# Altium PCB PCB1.PcbDoc
Units mm, origin at the board's own origin, x right, y up, seen from the top; angles counter-clockwise.
Board outline 58.42 x 54.86 mm, 2 copper layers (Top Layer, Bottom Layer); 43 components, 19 nets, 115 pads, 0 vias.
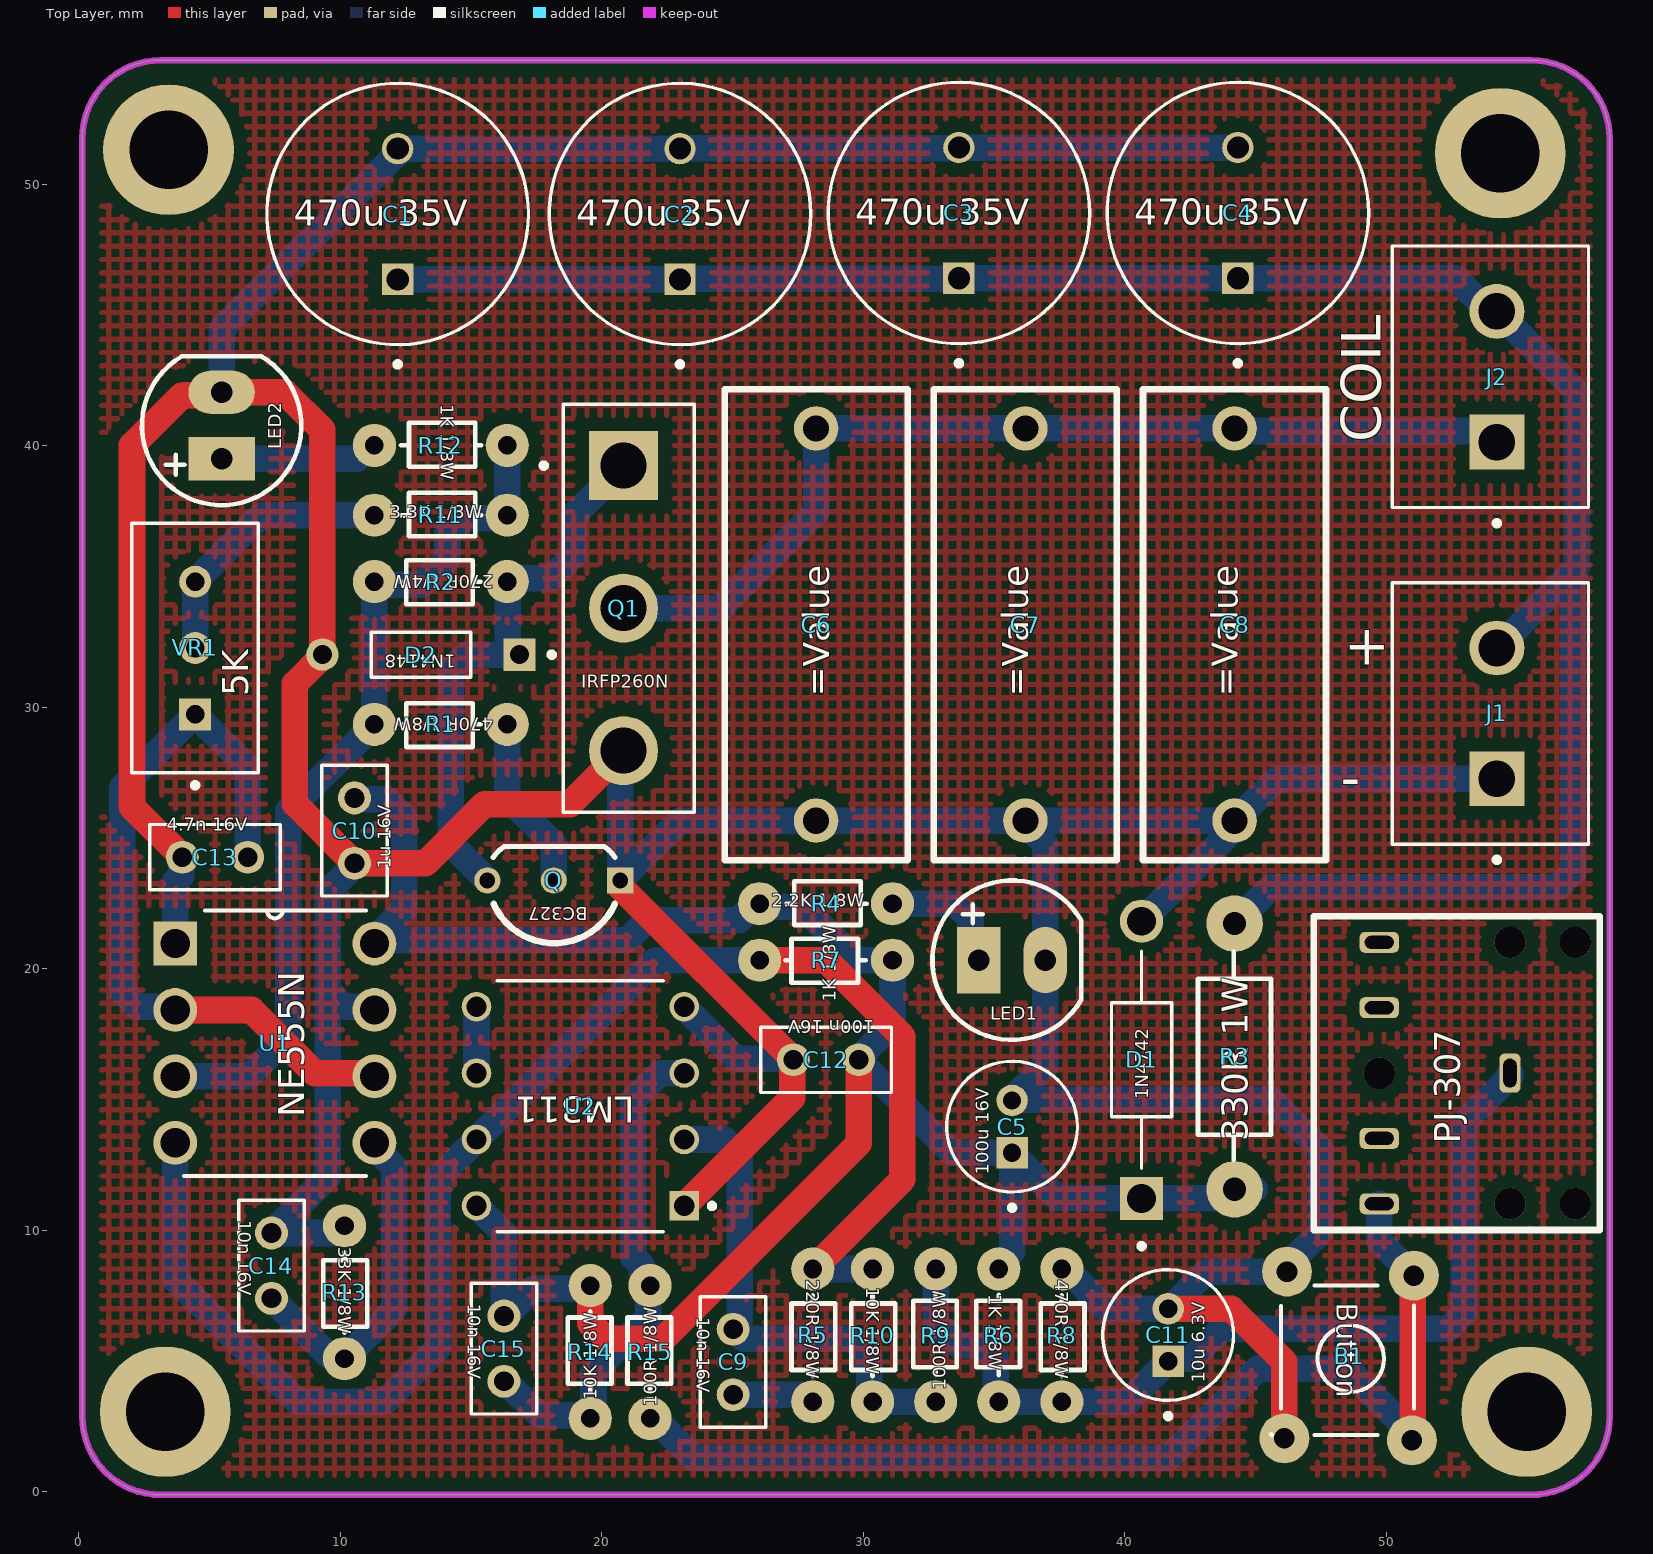
[diagram p0: Top Layer view]
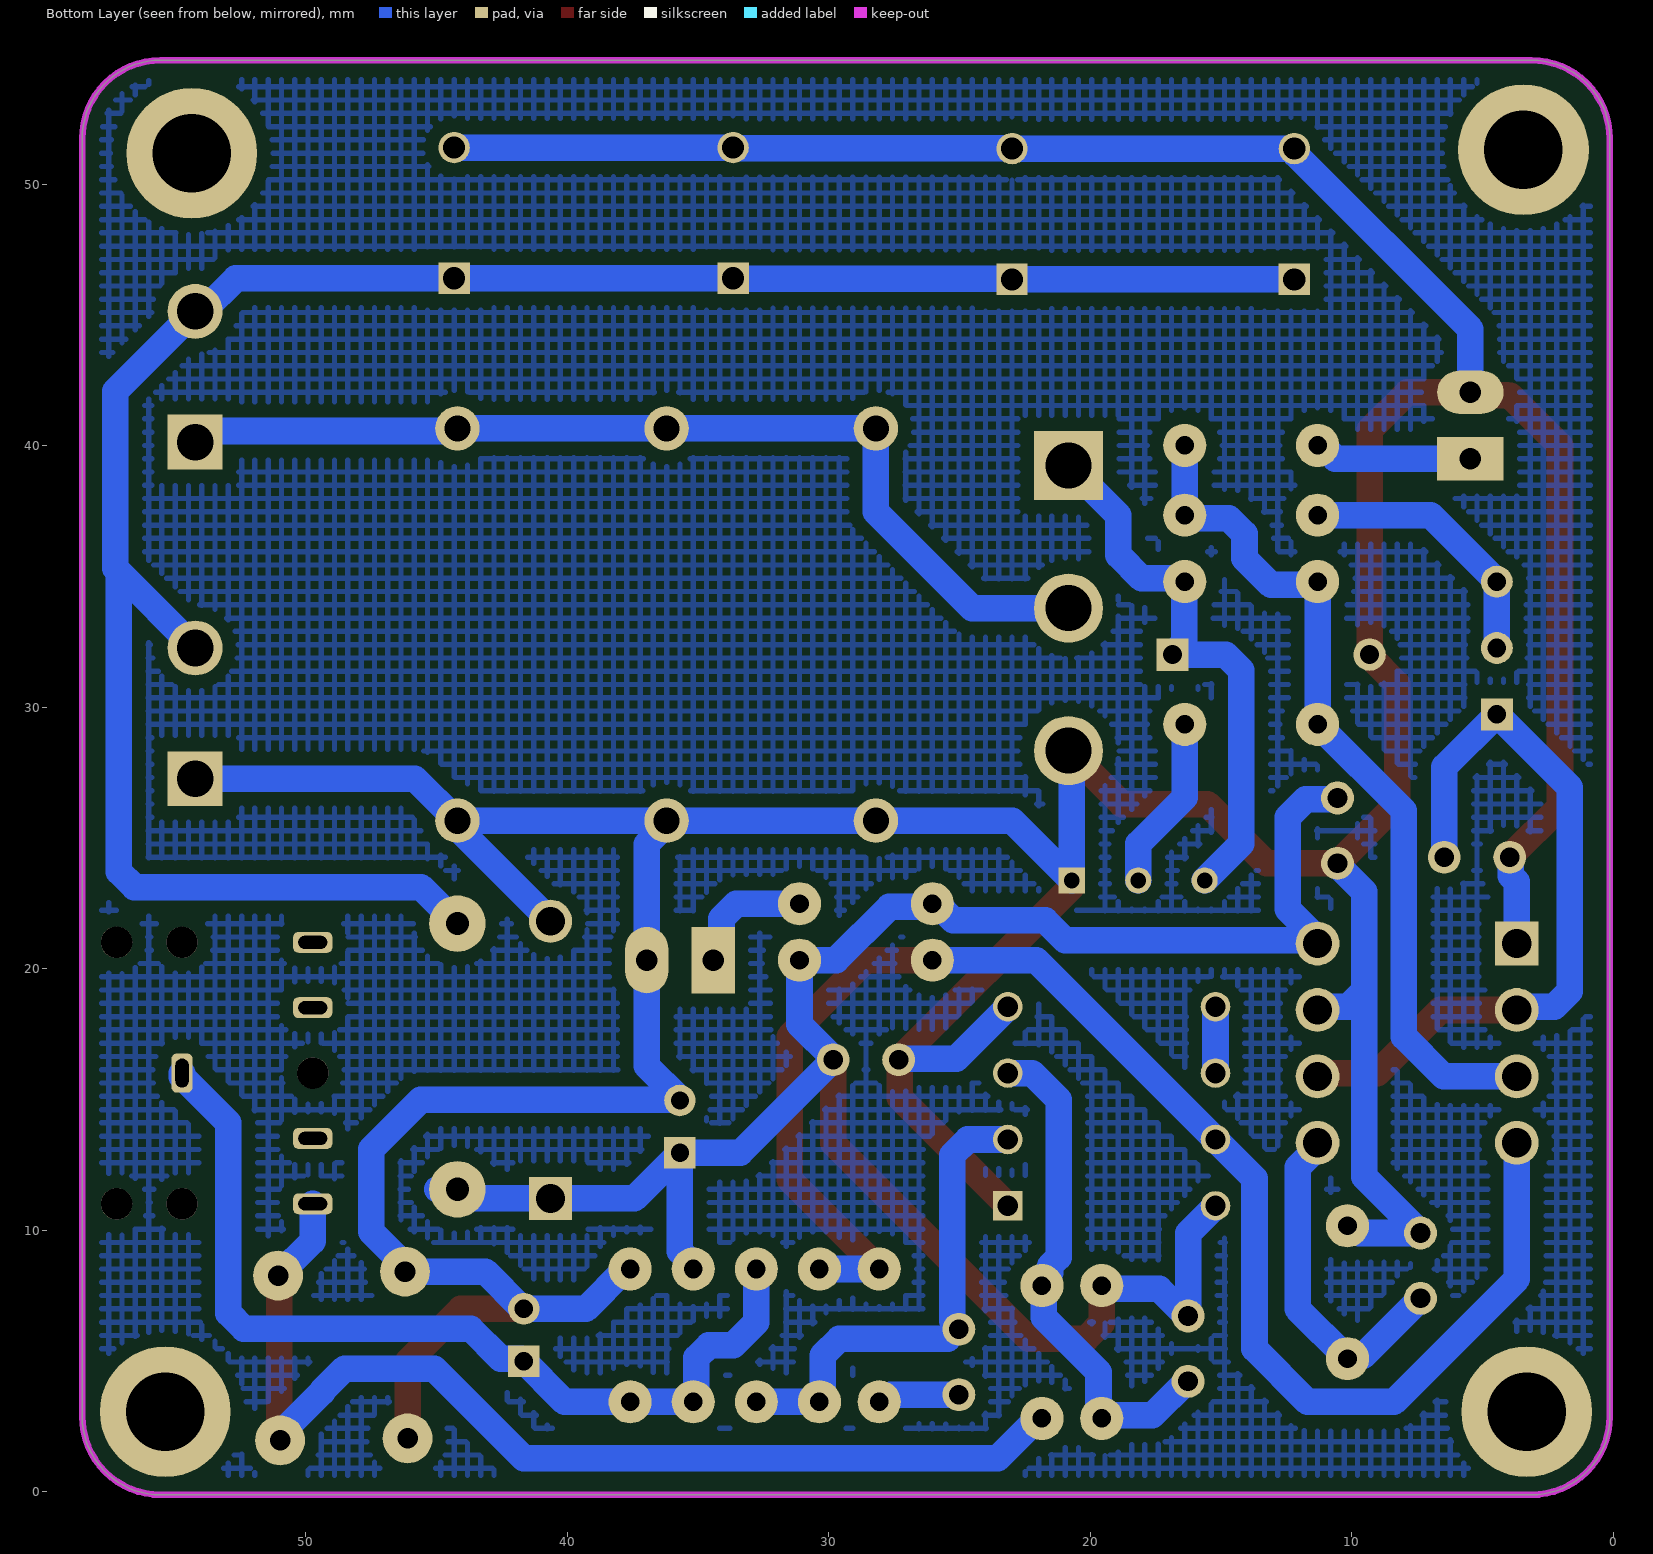
[diagram p1: Bottom Layer view, seen from below]
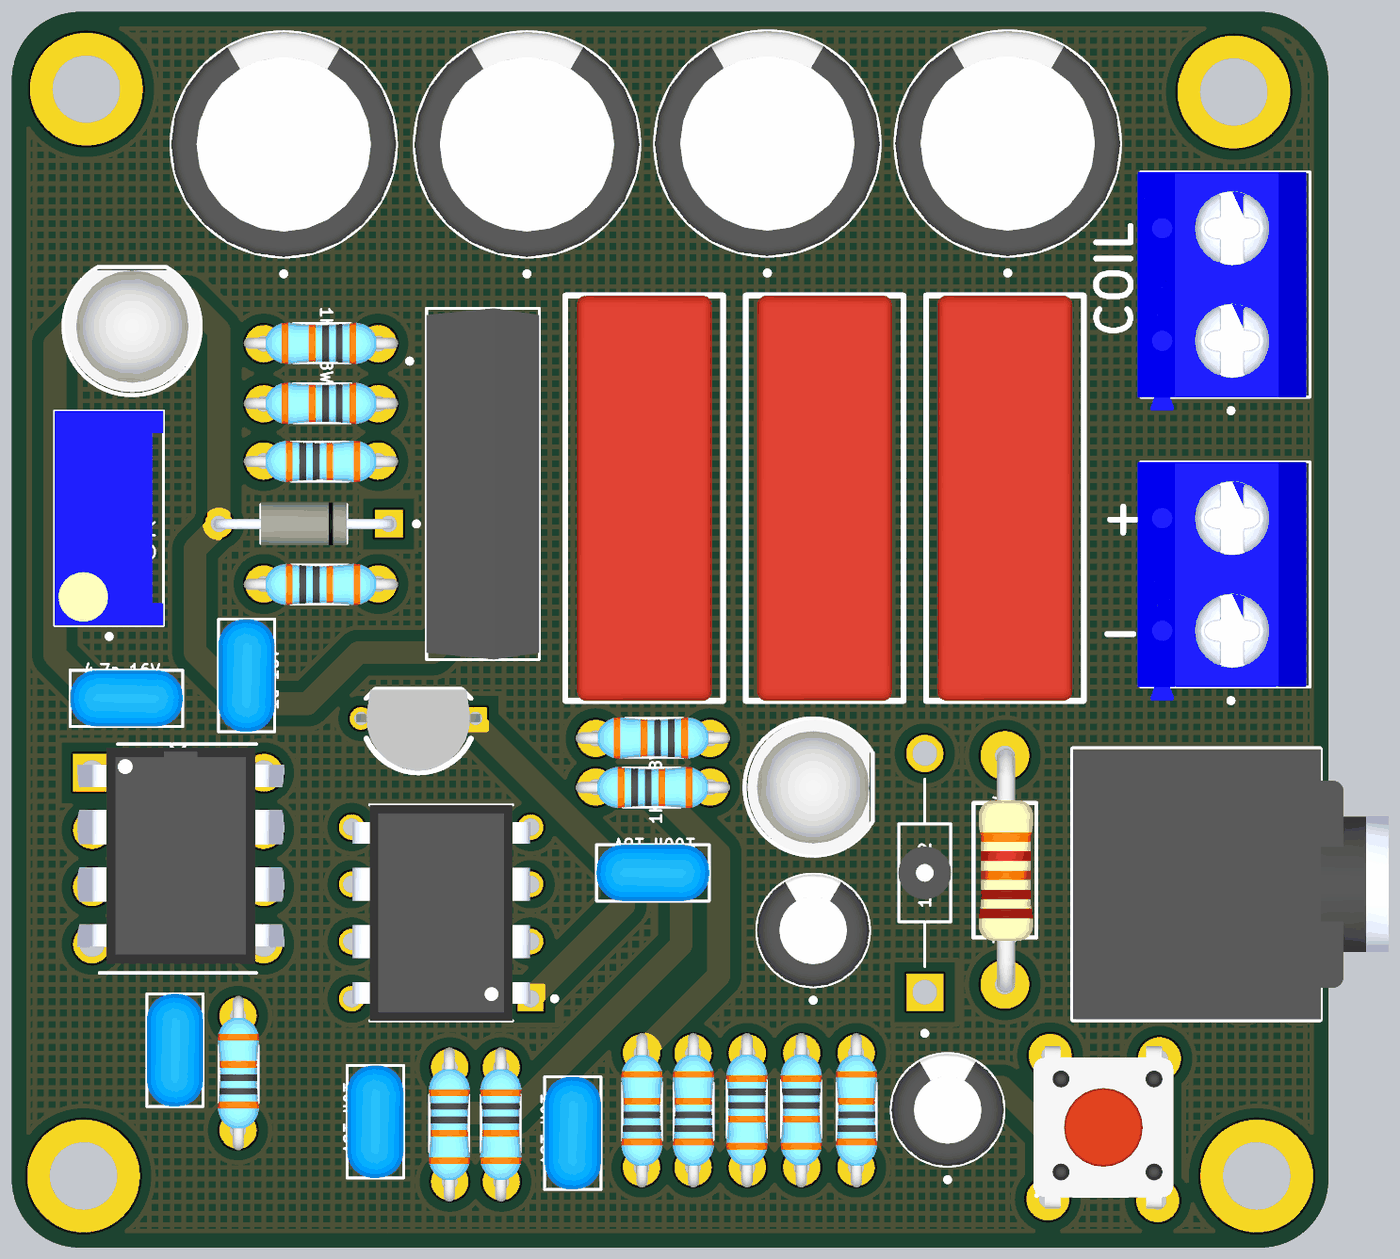
[diagram p2: 3D render of the assembled board from above, using the file's embedded part models]

## Layer stack, top to bottom
Top Solder: solder mask 0.0102, Solder Resist, Dk 3.5
Top Layer: signal copper 0.0356
Dielectric 1: dielectric 0.32, FR-4, Dk 4.8
Bottom Layer: signal copper 0.0356
Bottom Solder: solder mask 0.0102, Solder Resist, Dk 3.5

## Board outline
0.127,2.873 ccw(c3.127,2.873) 3.127,-0.127 55.547,-0.127 ccw(c55.547,2.873) 58.547,2.873 58.547,51.737 ccw(c55.547,51.737) 55.547,54.737 3.127,54.737 ccw(c3.127,51.737) 0.127,51.737

## Design rules (kind name [scope] priority, off if disabled: settings)
Clearance [All] p1: gap=0.254 ignorepadtopadclearanceinfootprint=FALSE except(0: Arc-Hole Track-Hole SMDPad-Hole THPad-Hole Via-Hole Fill-Hole Poly-Hole Region-Hole Text-Hole; 0.508: Arc-Fill Arc-Poly Arc-Region Track-Fill Track-Poly Track-Region SMDPad-Fill SMDPad-Poly SMDPad-Region THPad-Fill THPad-Poly THPad-Region Via-Fill Via-Poly Via-Region Fill-Fill Fill-Poly Fill-Region Poly-Poly Poly-Region Region-Region)
Height [All] p1: minheight=0 maxheight=100 prefheight=12.7
HoleSize [All] p1: absolutevalues=TRUE maxlimit=10 minlimit=0.025 maxpercent=80.000 minpercent=20.000
PolygonConnect [All] p1: connectstyle=Relief reliefconductorwidth=0.254 reliefentries=4 polygonreliefangle="90 Angle" airgapwidth=0.254
RoutingVias [All] p1: holewidth=0.711 width=1.27 viastyle="Through Hole" minholewidth=0.711 minwidth=1.27 maxholewidth=0.711 maxwidth=1.27
SilkToSilkClearance [All] p1: silktosilkclearance=0
SilkToSolderMaskClearance [IsPad] p1: minsilkscreentomaskgap=0 clearancetoexposedcopper=TRUE
SolderMaskExpansion [All] p1: expansion=0.102 istentingtop=FALSE
Width [All] p1: maxlimit=1.016 minlimit=0.508 preferedwidth=0.762
26 further rules are at their usual default settings.

## Components (designator, comment, footprint, x,y, rotation, side; value= is the part's Value field where it differs from the comment)
B1 "Button" "Button 4 DIP" 48.641,5.08 r270 top
C1 "470u 35V" CAP_10X16 12.192,48.855 r90 top value=100uF
C2 "470u 35V" CAP_10X16 22.987,48.855 r90 top value=100uF
C3 "470u 35V" CAP_10X16 33.655,48.895 r90 top value=100uF
C4 "470u 35V" CAP_10X16 44.323,48.895 r90 top value=100uF
C5 "100u 16V" "CAP 5x11" 35.687,13.954 r90 top value=100uF
C6 "=Value" MKP10 28.194,33.147 r90 top
C7 "=Value" MKP10 36.195,33.147 r90 top
C8 "=Value" MKP10 44.196,33.147 r90 top
C9 "10n 16V" CAP_2.54mm 25.019,4.953 r270 top
C10 "1u 16V" CAP_2.54mm 10.541,25.273 r270 top
C11 "10u 6.3V" "CAP 5x11" 41.656,5.985 r90 top value=100uF
C12 "100n 16V" CAP_2.54mm 28.575,16.51 r0 top
C13 "4.7n 16V" CAP_2.54mm 5.207,24.257 r0 top
C14 "10n 16V" CAP_2.54mm 7.366,8.636 r270 top
C15 "10n 16V" CAP_2.54mm 16.256,5.461 r270 top
D1 "1N4742" DIOAD1060W70L435D230 40.64,16.51 r90 top
D2 "1N4148" 1N4148 13.081,32.004 r180 top
J1 "Domino 2P" HANDSON_KF301-2P 54.229,29.758 r90 top
J2 "" HANDSON_KF301-2P 54.229,42.632 r90 top
LED1 "LED" LED-5-RED 34.417,20.32 r0 top value="LED 3 ly Single Colour"
LED2 "LED" LED-5-RED 5.461,39.497 r90 top value="LED 3 ly Single Colour"
PJ-307 "Jack 3.5" PJ-307 54.229,16.002 r90 top (schematic designator J?)
Q "BC327" TO-92 18.161,23.368 r180 top
Q1 "IRFP260N" IRFP260N 20.828,33.782 r270 top
R1 "470R 1/8W" R1/8W 13.843,29.337 r180 top
R2 "270R 1/4W" R1/8W 13.843,34.798 r180 top
R3 "330R 1W" R1/2W 44.196,21.717 r270 top
R4 "2.2K 1/8W" R1/8W 28.575,22.479 r0 top
R5 "220R 1/8W" R1/8W 28.067,5.969 r270 top
R6 "1K 1/8W" R1/8W 35.179,5.969 r90 top
R7 "1K 1/8W" R1/8W 28.575,20.32 r180 top
R8 "470R 1/8W" R1/8W 37.592,5.969 r270 top
R9 "100R 1/8W" R1/8W 32.766,5.969 r90 top
R10 "10K 1/8W" R1/8W 30.353,5.969 r270 top
R11 "3.3K 1/8W" R1/8W 13.843,37.338 r0 top
R12 "1K 1/8W" R1/8W 13.843,40.005 r0 top
R13 "33K 1/8W" R1/8W 10.16,7.62 r270 top
R14 "10K 1/8W" R1/8W 19.558,5.334 r90 top
R15 "100R 1/8W" R1/8W 21.844,5.334 r90 top
U1 "NE555N" NE555PE 11.303,13.335 r0 top
U2 "LM311" LM311PE 19.177,14.732 r180 top
VR1 "5K" TRIM_3296W-1-502 4.445,32.258 r90 top

## Footprints (in the part's own frame and the unit in brackets; to place one, negate y for a bottom-side part, rotate by r counter-clockwise, add the part's x,y. Pads: shape width x height; smd on the part's side, far side on the other; paste and mask are expansions set on the pad)
1N4148 [mm]
  round 1.238 hole 0.73: A(3.768,0)
  rect 1.238x1.238 / inner round 1.238 / far side rect 1.238x1.238 hole 0.73: K(-3.768,0)
  silkscreen extent -5.1,-0.86 1.9,0.86, body extent -4,-0.95 4,0.96, height 1.91
"Button 4 DIP" [mil]
  round 75 hole 31: 1(-125,95) 2(120,-100) 3(123,92) 4(-131,-96)
  silkscreen extent -110,-120 115,95, body extent -161,-125 151,119, height 276
"CAP 5x11" [mm]
  rect 1.208x1.208 / inner round 1.208 / far side rect 1.208x1.208 hole 0.7: 1(-1,0)
  round 1.208 hole 0.7: 2(1,0)
  silkscreen extent -3.2,-2.5 2.5,2.5, body extent -2.5,-2.5 2.5,2.5, height 12.5
CAP_2.54mm [mm] "GOM"
  round 1.258 hole 0.75: 1(-1.25,0) 2(1.25,0)
  silkscreen extent -2.5,-1.25 2.5,1.25, body extent -2.5,-1.25 2.5,1.25, height 6
CAP_10X16 [mm]
  rect 1.2x1.2 hole 0.85: 1(-2.5,0)
  round 1.2 hole 0.85: 2(2.5,0)
  silkscreen extent -5.85,-5 5,5, body extent -5,-5 5,5, height 16
DIOAD1060W70L435D230 [mm]
  round 1.65 hole 1.1: A(5.3,0)
  rect 1.65x1.65 hole 1.1: K(-5.3,0)
  silkscreen extent -7.22,-1.15 4.16,1.15, body extent -1.17,-1.17 1.17,1.17, height 27.72
HANDSON_KF301-2P [mm]
  rect 2.1x2.1 hole 1.4: 1(-2.5,0)
  round 2.1 hole 1.4: 2(2.5,0)
  silkscreen extent -5.7,-3.5 5,4, body extent -5.6,-3.35 5,4.15, height 10
IRFP260N [mm]
  rect 2.64x2.64 hole 1.76: 1(-5.45,0)
  round 2.64 hole 1.76: 2(0,0) 3(5.45,0)
  silkscreen extent -7.8,-3.15 7.8,2.7, body extent -7.8,-2.3 7.8,2.7, height 35.1
LED-5-RED [mil] "LED 2 PIN, 5 ly , Only colour,pin to pin 100mil"
  rect 65x100 hole 32: 1(0,0)
  oval 65x100 hole 32: 2(100,0)
  silkscreen extent -70,-120 154,120, body extent -65,-119 149,118, height 339
LM311PE [mm]
  rect 1.13x1.13 / inner round 1.13 / far side rect 1.13x1.13 hole 0.78: 1(-3.97,3.81)
  round 1.13 hole 0.78: 2(-3.97,1.27) 3(-3.97,-1.27) 4(-3.97,-3.81) 5(3.97,-3.81) 6(3.97,-1.27) 7(3.97,1.27) 8(3.97,3.81)
  silkscreen extent -5.13,-4.79 3.18,4.79, body extent -3.94,-4.79 3.94,4.79, height 5.08
MKP10 [mm] "250VAC-0.1uF"
  round 1.7 hole 1: 1(-7.493,0) 2(7.507,0)
  silkscreen extent -9,-3.5 9,3.5, body extent -9,-3 9,3, height 13.01
NE555PE [mil]
  rect 66x66 / inner round 66 / far side rect 66x66 hole 44: 1(-300,300)
  round 66 hole 44: 2(-300,200) 3(-300,100) 4(-300,0) 5(0,0) 6(0,100) 7(0,200) 8(0,300)
  silkscreen extent -287,-50 -13,350, body extent -360,-34 70,344, height 210
PJ-307 [mm]
  rrect50% 1.5x0.8 hole 0.5 slot 1.1 at 0 deg: 1(0,-0.5)
  rrect50% 0.8x1.5 hole 0.5 slot 1.1 at 90 deg: 2(-5,4.5) 3(-2.5,4.5) 4(2.5,4.5) 5(5,4.5)
  round 1.2 hole 1.2: ""(-5,-3) ""(-5,-0.5) ""(0,4.5) ""(5,-3) ""(5,-0.5)
  silkscreen extent -6,-3.94 6,7, body extent -6,-7 6,7, height 5.5
R1/2W [mil] "R 1/2W, 2 pin, 300mil"
  round 85 hole 35: 1(0,0) 2(400,0)
  silkscreen extent 42,-55 356,55, body extent -12,-45 414,49, height 91
R1/8W [mil] "R 1/8W, 2 pin, 300mil"
  round 65 hole 28: 1(-100,0) 2(100,0)
  silkscreen extent -60,-32 61,34, body extent -135,-35 135,37, height 86
TO-92 [mm]
  round 1 hole 0.6: B(0,0) E(2.54,0)
  rect 1x1 hole 0.6: C(-2.54,0)
  silkscreen extent -2.34,-1.3 2.32,2.4, body extent -2.74,-1.28 2.74,2.32, height 8.6
TRIM_3296W-1-502 [mm]
  rect 1.218x1.218 hole 0.71: 1(-2.54,0)
  round 1.218 hole 0.71: 2(0,0) 3(2.54,0)
  silkscreen extent -5.35,-2.41 4.76,2.42, body extent -4.76,-2.41 4.76,2.42, height 11.55

## Part data
B1: library part "Button DIP"
C1 C2 C3 C4 C5 C11: library part Cap_P
C6 C7 C8 C9 C10 C12 C13 C14 C15: library part CAP
  C6 C7 C8: MKP10="100n 250V"
D1: library part "DIODE Z"
D2: library part DIODE
J1: "2 Pin Terminal Block 5mm Pitch. KF301-2P", Package=None, Availability=Unavailable, MP=KF301-2P, Price=None
J2: library part "Domino 2P", "2 Pin Terminal Block 5mm Pitch. KF301-2P", Package=None, Availability=Unavailable, MP=KF301-2P, Price=None
LED1 LED2: "LED Single colour Green and Red"
PJ-307: library part "Jack 3.5 mr"
Q: library part Transistor, "Transistor bipolar _BJT_ PNP 45V 800mA 100MHz 625mW Agujero pasante TO-92-3", Package="TO-92 Fairchild Semiconductor", Availability=Unavailable, MF=ON, MP=BC327BU, Price=None, SnapEDA_Link=https://www.snapeda.com/parts/BC327BU/ON%20Semiconductor/view-part/829010/?ref=snap
Q1: "N-Channel 200V 50A (Tc) 300W (Tc) Through Hole TO-247AC", Package="TO-247-3 Infineon Technologies", Availability=Unavailable, Check_prices=https://www.snapeda.com/parts/IRFP260N/Infineon%20Technologies/view-part/2777552/?ref=eda, MF="Infineon Technologies", MP=IRFP260N, Price=None, SnapEDA_Link=https://www.snapeda.com/parts/IRFP260N/Infineon%20Technologies/view-part/2777552/?ref=snap
R1 R2 R3 R4 R5 R6 R7 R8 R9 R10 R11 R12 R13 R14 R15: library part Res, "Res"
U1: "555 Type, Timer/Oscillator (Single) IC 500kHz 8-DIP", Package="DIP-8 STMicroelectronics", Availability="In Stock", Check_prices=https://www.snapeda.com/parts/NE555N/STMicroelectronics/view-part/?ref=eda, MF=STMicroelectronics, MP=NE555N, Price=None, Purchase-URL=https://pricing.snapeda.com/search/part/NE555N/?ref=eda, SnapEDA_Link=https://www.snapeda.com/parts/NE555N/STMicroelectronics/view-part/?ref=snap
U2: "High Speed, 30V, Differential Comparator With Strobes 8-PDIP 0 to 70", Package="PDIP-8 Texas", Availability="In Stock", Check_prices=https://www.snapeda.com/parts/LM311PE4/Texas+Instruments/view-part/?ref=eda, MF="Texas Instruments", MP=LM311PE4, Price=None, Purchase-URL=https://pricing.snapeda.com/search/part/LM311PE4/?ref=eda, SnapEDA_Link=https://www.snapeda.com/parts/LM311PE4/Texas+Instruments/view-part/?ref=snap
VR1: library part "Res var", "5 kOhms 0.5W, 1/2W PC Pins Through Hole Trimmer Potentiometer Cermet 25.0 Turn Top Adjustment", Package="SOT-23-5 Bourns", Availability="In Stock", Check_prices=https://www.snapeda.com/parts/3296W-1-502/Bourns/view-part/?ref=eda, MF=Bourns, MP=3296W-1-502, Price=None, Purchase-URL=https://pricing.snapeda.com/search/part/3296W-1-502/?ref=eda, SnapEDA_Link=https://www.snapeda.com/parts/3296W-1-502/Bourns/view-part/?ref=snap

## Free pads (board coordinates)
  round 5 hole 3: ""(3.302,3.048) ""(3.429,51.308) ""(54.356,51.181) ""(55.372,3.048)

## Nets (pads, with @x,y where several pads share a name; then routed paths per layer and width w, separated by ;. In a path a pad name is that pad's centre, name@x,y a point inside that pad or via, vN(x,y) a via of type N, cw(c..) or ccw(c..) an arc to the next point about the centre after c; other vN are vias at no path point)
12V: C5.1 C10.1 C12.2 C15.1 D1.K R3.2 R4.1 R6.2 R7.1 R14.2 U1.8 U2.8 | length 82
  Top Layer w1.016: R14.2 19.558,6.437 20.153,5.842 22.352,5.842 29.825,13.315 C12.2
  Bottom Layer w1.016: C10.1 10.587,26.477 11.75,26.477 12.446,25.781 12.446,22.277 11.573,21.404 11.303,21.134 U1.8 11.429,21.081 U1.8@11.896,21.081 ; U1.8@11.897,21.082 20.955,21.082 21.717,21.844 25.228,21.844 25.863,22.479 R4.1 26.157,22.357 27.681,22.357 29.718,20.32 R7.1 31.115,17.865 29.825,16.575 C12.2 33.381,12.954 C5.1 ; U2.8 16.256,9.873 C15.1 16.321,6.711 17.357,7.747 18.288,7.747 18.293,7.752 19.436,7.752 R14.2 ; R6.2 35.179,8.681 35.687,9.189 C5.1 ; R3.2@44.958,11.557 44.649,11.557 44.302,11.21 41.021,11.21 37.431,11.21 C5.1
24V: C1.1 C2.1 C3.1 C4.1 J1.2 J2.2 R3.1 | length 83.2
  Bottom Layer w1.016: C1.1 C2.1 23.007,46.375 33.635,46.375 C3.1 C4.1 52.673,46.395 53.936,45.132 J2.2 57.277,42.084 57.277,35.306 57.15,35.179 ; R3.1 45.593,23.114 56.555,23.114 57.15,23.709 57.15,35.179 ; J1.2 57.15,35.179
GND: B1.2 B1.4 C1.2 C2.2 C3.2 C4.2 C5.2 C6.1 C7.1 C8.1 C10.2 C11.2 C12.1 C13.1 C14.1 D1.A D2.A J1.1 LED1.2 LED2.2 Q1.3 Q.C R8.1 R13.1 U1.1 U1.7 U2.1 U2.4 | length 238.3
  Top Layer w1.016: C13.1 2.032,26.182 2.032,40.005 3.937,41.91 4.064,41.91 4.069,41.915 5.339,41.915 LED2.2 7.874,42.037 9.313,40.598 D2.A 9.313,31.944 8.255,30.886 8.255,26.309 C10.2 13.251,24.023 15.517,26.289 18.785,26.289 Q1.3 ; Q.C 20.701,23.134 C12.1 27.279,16.464 27.279,15.054 U2.1 ; C11.2 44.069,6.985 46.101,4.953 B1.2
  Bottom Layer w1.016: U1.1 3.683,23.317 3.911,23.545 3.911,24.211 C13.1 ; LED2.2 5.461,44.45 12.157,51.146 12.157,51.32 C1.2 C2.2 23.007,51.375 33.635,51.375 C3.2 C4.2 ; R13.1 9.988,10.16 9.714,9.886 C14.1 9.525,12.045 9.525,19.137 ; C10.2 10.541,23.958 9.525,22.942 9.525,19.137 ; U1.7 11.177,18.541 10.12,18.541 9.525,19.137 ; Q1.3 20.701,28.205 Q.C 22.987,25.654 C6.1 C7.1 ; U2.4 23.147,18.527 25.117,16.556 27.279,16.556 C12.1 ; R8.1 37.764,8.509 39.288,6.985 C11.2 41.708,6.985 43.13,8.407 B1.4 46.203,8.648 47.498,9.943 47.498,13.081 45.593,14.986 35.719,14.986 C5.2 35.687,15.006 36.957,16.276 LED1.2 36.957,24.755 36.195,25.517 C7.1 ; D1.A 44.065,25.235 44.065,25.523 C8.1 ; B1.2 B1.2@46.152,2.083 ; J1.1 45.825,27.258 44.221,25.654 C8.1 ; C7.1 C8.1
NetB1_1: B1.1 B1.3 PJ-307.2 R15.1 | length 42.1
  Top Layer w1.016: B1.3 51.016,1.994 51.016,8.217 B1.1
  Bottom Layer w1.016: R15.1 22.016,2.794 23.54,1.27 41.656,1.27 45.085,4.699 48.514,4.699 49.371,3.842 49.371,3.803 50.978,2.196 B1.3 ; PJ-307.2 49.729,9.58 B1.1
NetC9_1: C9.1 R9.1 R10.2 U2.2 | length 18.4
  Bottom Layer w1.016: U2.2 24.678,13.462 25.273,12.867 25.273,6.522 25.019,6.268 C9.1 ; C9.1@25.445,5.842 29.591,5.842 30.231,5.202 30.231,3.551 R10.2 R9.1
NetC9_2: C9.2 R5.2 | length 3.2
  Bottom Layer w1.016: C9.2 27.621,3.703 27.895,3.429 R5.2
NetC11_1: C11.1 PJ-307.1 R6.1 R8.2 R9.2 | length 35.7
  Bottom Layer w1.016: R9.2 32.766,6.477 33.655,5.588 34.584,5.588 35.057,5.114 35.057,3.551 R6.1 R8.2 40.1,3.429 41.752,5.081 42.546,5.081 43.688,6.223 52.364,6.223 52.959,6.818 52.959,14.098 54.729,15.868 PJ-307.1
NetC14_2: C14.2 R13.2 U1.5 | length 13.1
  Bottom Layer w1.016: C14.2 9.55,5.202 10.038,5.202 R13.2 12.065,6.985 12.065,12.394 11.303,13.156 U1.5
NetC15_2: C15.2 R14.1 R15.2 U2.3 | length 19.6
  Bottom Layer w1.016: C15.2 16.321,4.211 17.617,2.916 19.436,2.916 R14.1 19.68,2.916 19.68,4.567 21.77,6.657 21.77,7.8 R15.2 21.844,8.046 21.526,8.363 21.526,8.641 21.209,8.958 21.209,14.986 22.225,16.002 U2.3
NetD2_K: D2.K Q1.1 Q.E R2.1 | length 21.6
  Bottom Layer w1.016: Q.E 14.224,24.765 14.224,31.409 14.819,32.004 D2.K 16.405,32.448 16.405,34.776 R2.1 16.505,34.92 18.029,34.92 18.923,35.814 18.923,37.327 Q1.1
NetLED1_1: LED1.1 R4.2 | length 5.8
  Bottom Layer w1.016: R4.2@31.237,22.601 R4.2 33.528,22.479 34.099,21.907 34.099,20.637 LED1.1 34.417,20.124 LED1.1@34.099,19.807
NetLED2_1: LED2.1 R12.1 | length 6.1
  Bottom Layer w1.016: LED2.1 10.623,39.497 11.131,40.005 R12.1
NetQ_B: Q.B R1.1 | length 6.7
  Bottom Layer w1.016: R1.1 16.383,26.543 18.161,24.765 Q.B
NetR11_1: R11.1 VR1.2 VR1.3 | length 10.5
  Bottom Layer w1.016: VR1.2 VR1.3 6.985,37.338 R11.1
NetU2_5: U2.5 U2.6 | length 2.5
  Bottom Layer w1.016: U2.6 U2.5
OUT: R1.2 R2.2 R11.2 R12.2 U1.3 | length 33.2
  Bottom Layer w1.016: U1.3 6.477,15.875 8.001,17.399 8.001,26.035 R1.2 R2.2 11.425,34.676 13.076,34.676 13.081,34.671 14.097,35.687 14.097,36.621 14.692,37.216 16.261,37.216 R11.2 R12.2
PT: C6.2 C7.2 C8.2 J2.1 Q1.2 | length 38.3
  Bottom Layer w1.016: Q1.2 24.511,33.782 28.194,37.465 C6.2 C7.2 C8.2 44.293,40.557 53.804,40.557 J2.1
TT: C13.2 U1.2 U1.6 VR1.1 | length 29
  Top Layer w1.016: U1.2 6.604,18.415 9.018,16.001 11.177,16.001 U1.6
  Bottom Layer w1.016: U1.2 3.557,18.541 2.246,18.541 1.651,19.137 1.651,26.924 VR1.1 6.457,27.706 C13.2
ZCD: R5.1 R7.2 R10.1 U1.4 U2.7 | length 59.6
  Top Layer w1.016: R7.2 28.575,20.32 31.496,17.399 31.496,11.938 R5.1
  Bottom Layer w1.016: U1.4 3.683,8.128 8.382,3.429 11.684,3.429 13.716,5.461 13.716,11.971 U2.7 22.065,20.32 R7.2 ; R5.1 R10.1
pads on no net: PJ-307. PJ-307.3 PJ-307.4 PJ-307.5

## Polygon pours and split planes (outlines as drawn)
no net on Top Layer "NONET_L01_P000" (hatched 90Degree grid 0.508 track 0.203, pour order 0): 0.127,2.873 ccw(c3.127,2.873) 3.127,-0.127 55.547,-0.127 ccw(c55.547,2.873) 58.547,2.873 58.547,51.737 ccw(c55.547,51.737) 55.547,54.737 3.127,54.737 ccw(c3.127,51.737) 0.127,51.737
no net on Bottom Layer "NONET_L02_P001" (hatched 90Degree grid 0.508 track 0.203, pour order 1): 0.127,2.873 ccw(c3.127,2.873) 3.127,-0.127 55.547,-0.127 ccw(c55.547,2.873) 58.547,2.873 58.547,51.737 ccw(c55.547,51.737) 55.547,54.737 3.127,54.737 ccw(c3.127,51.737) 0.127,51.737

## Keep-outs
Keep-Out Layer:
  the board outline again, w0.254

## Silkscreen, mask and mechanical layers (free items; w line width, h text height)
Top Overlay:
  text "COIL" at 49.784,40.132 h1.52 r90
  text "+" at 48.387,31.623 h1.52
  text "-" at 48.26,26.543 h1.52